# EAGLE board Tube_board_v4 (EAGLE 6.5.0)
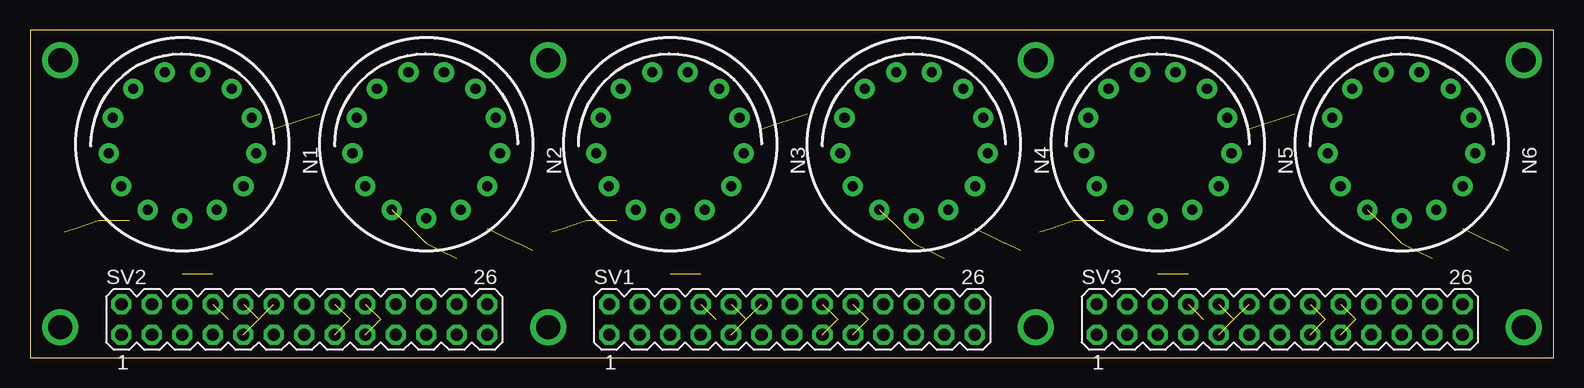
[diagram p0: board, top side]
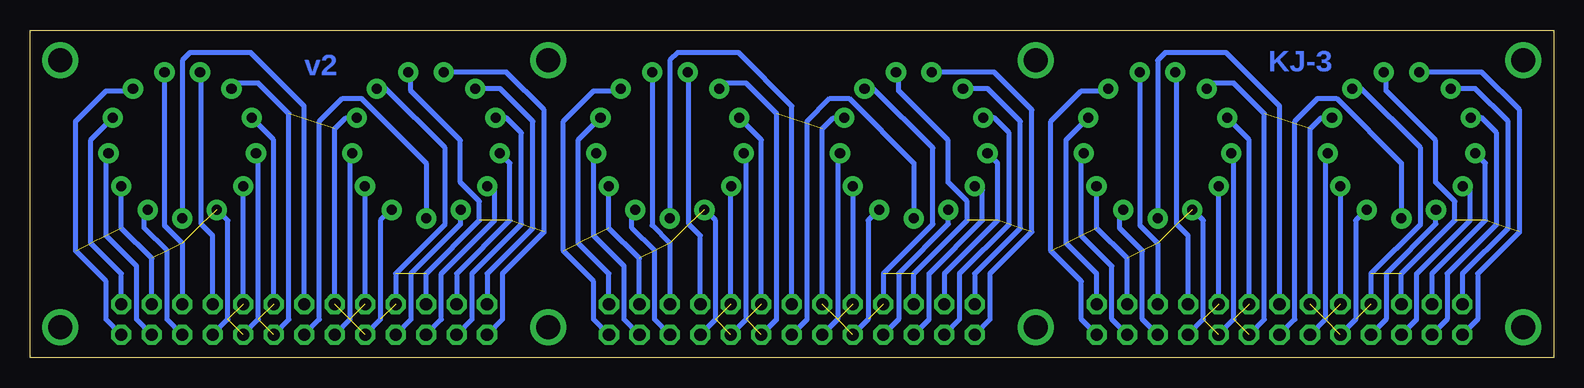
[diagram p1: board, bottom side, seen from below]

Size 126.99 x 27.3 mm. Coordinates in mm from the lower left corner, seen from the top.
Outline: 0,0 126.99,0 126.99,27.3 0,27.3 0,0
Copper layers (1*16): Top 0.035mm / dielectric 1.5mm / Bottom 0.035mm
Design rules "default": minimum track width 10mil, minimum drill 24mil, track to track 8mil, track to pad 8mil, pad to pad 8mil, via to via 8mil, smd to smd 8mil, copper to edge 40mil, drill to drill 8mil, minimum pad ring 10mil, minimum via ring 8mil, stop-mask expansion 4mil, vias tented up to drill 0mil, thermal gap 10mil
Net classes: 0 default: width 0.051 mm, clearance 0.205 mm

## Footprints (pad centres in the part's own frame; a part is rotated, then mirrored left to right if it is on the bottom)
IN-14 = drill 0.84 pad 1.676: 0 5.094,-3.516; 1 -5.094,-3.516; 2 -6.145,-0.746; 3 -5.788,2.195; 4 -4.105,4.633; 5 -1.481,6.01; 6 1.481,6.01; 7 4.105,4.633; 8 5.788,2.195; 9 6.145,-0.746; A 0,-6.19; LHDP 2.877,-5.481; RHDP -2.877,-5.481
MA13-2 = drill 1.016 pad 1.676 octagon: 1 -15.24,-1.27; 2 -15.24,1.27; 3 -12.7,-1.27; 4 -12.7,1.27; 5 -10.16,-1.27; 6 -10.16,1.27; 7 -7.62,-1.27; 8 -7.62,1.27; 9 -5.08,-1.27; 10 -5.08,1.27; 11 -2.54,-1.27; 12 -2.54,1.27; 13 0,-1.27; 14 0,1.27; 15 2.54,-1.27; 16 2.54,1.27; 17 5.08,-1.27; 18 5.08,1.27; 19 7.62,-1.27; 20 7.62,1.27; 21 10.16,-1.27; 22 10.16,1.27; 23 12.7,-1.27; 24 12.7,1.27; 25 15.24,-1.27; 26 15.24,1.27

## Placement (x,y rotation side)
N1  IN-14  [IN-14]  12.7,17.78 0 top
N2  IN-14  [IN-14]  33.02,17.78 0 top
N3  IN-14  [IN-14]  53.34,17.78 0 top
N4  IN-14  [IN-14]  73.66,17.78 0 top
N5  IN-14  [IN-14]  93.98,17.78 0 top
N6  IN-14  [IN-14]  114.3,17.78 0 top
SV1  [MA13-2]  63.5,3.17 0 top
SV2  [MA13-2]  22.86,3.17 0 top
SV3  [MA13-2]  104.14,3.17 0 top

## Library data of the parts
N1-N6 = russian-nixies
SV1-SV3 = con-lstb; OC_FARNELL: unknown; OC_NEWARK: unknown

## Nets
N$1: N1.A SV2.13
N$2: N2.A SV2.14
N$3: N1.0 N1.1 N1.2 N1.3 N1.4 N1.5 N1.6 N1.7 N1.8 N1.9 N1.LHDP N1.RHDP N2.0 N2.1 N2.2 N2.3 N2.4 N2.5 N2.6 N2.7 N2.8 N2.9 N2.LHDP N2.RHDP SV2.1 SV2.2 SV2.3 SV2.4 SV2.5 SV2.6 SV2.7 SV2.8 SV2.9 SV2.10 SV2.11 SV2.12 SV2.15 SV2.16 SV2.17 SV2.18 SV2.19 SV2.20 SV2.21 SV2.22 SV2.23 SV2.24 SV2.25 SV2.26
N$4: N3.A SV1.13
N$5: N4.A SV1.14
N$10: N3.0 N3.1 N3.2 N3.3 N3.4 N3.5 N3.6 N3.7 N3.8 N3.9 N3.LHDP N3.RHDP N4.0 N4.1 N4.2 N4.3 N4.4 N4.5 N4.6 N4.7 N4.8 N4.9 N4.LHDP N4.RHDP SV1.1 SV1.2 SV1.3 SV1.4 SV1.5 SV1.6 SV1.7 SV1.8 SV1.9 SV1.10 SV1.11 SV1.12 SV1.15 SV1.16 SV1.17 SV1.18 SV1.19 SV1.20 SV1.21 SV1.22 SV1.23 SV1.24 SV1.25 SV1.26
N$13: N5.A SV3.13
N$14: N6.A SV3.14
N$15: N5.0 N5.1 N5.2 N5.3 N5.4 N5.5 N5.6 N5.7 N5.8 N5.9 N5.LHDP N5.RHDP N6.0 N6.1 N6.2 N6.3 N6.4 N6.5 N6.6 N6.7 N6.8 N6.9 N6.LHDP N6.RHDP SV3.1 SV3.2 SV3.3 SV3.4 SV3.5 SV3.6 SV3.7 SV3.8 SV3.9 SV3.10 SV3.11 SV3.12 SV3.15 SV3.16 SV3.17 SV3.18 SV3.19 SV3.20 SV3.21 SV3.22 SV3.23 SV3.24 SV3.25 SV3.26

## Tracks (layer width: path | path; a pad name or v marks a point on that pad's centre or on a via)
N$1
  Bottom 0.406: N1.A 12.7,16.19 18.1,21.59 19.68,21.59 21.59,19.68 21.59,3.17 SV2.13
N$2
  Bottom 0.406: SV2.14 22.86,20.95 27.3,25.4 32.38,25.4 33.02,24.77 N2.A
N$3  (23 unrouted)
  Bottom 0.406: N1.RHDP 9.82,11.13 13.97,6.99 13.97,3.17 SV2.7 | N1.9 19.05,16.83 19.05,3.17 SV2.11 | N2.4 28.47,22.86 26.67,22.86 24.13,20.32 24.13,3.17 SV2.15 | SV2.16 25.4,18.14 N2.3 | SV2.17 26.67,3.17 26.67,16.83 N2.2 | SV2.18 N2.1 | SV2.19 29.21,3.17 29.21,11.43 30.08,12.3 N2.RHDP | SV2.20 30.48,10.16 31.43,11.11 31.43,23.68 N2.5 | N2.6 34.5,11.01 33.02,9.53 SV2.22 | SV2.21 34.29,3.17 34.29,8.89 36.2,10.79 36.2,12 N2.LHDP | SV2.24 35.56,8.26 38.1,10.79 N2.0 | SV2.23 36.83,3.17 36.83,7.62 39.37,10.16 39.37,16.83 N2.9 | SV2.26 38.1,6.99 40.64,9.53 40.64,18.14 N2.8 | SV2.25 39.37,3.17 39.37,6.35 41.91,8.89 41.91,19.68 39.37,22.23 37.31,22.23 N2.7 | N1.7 16.06,22.41 11.11,17.46 11.11,11.11 15.24,6.99 SV2.8 | N1.6 13.97,23.58 13.97,22.23 9.84,18.1 9.84,14.61 8.26,13.02 8.26,11.43 12.7,6.99 SV2.6 | N1.1 7.28,14.26 6.99,13.97 6.99,11.43 11.43,6.99 11.43,3.17 SV2.5 | N1.2 5.71,16.19 5.71,11.43 10.16,6.99 SV2.4 | N1.3 6,19.98 4.76,18.73 4.76,11.11 8.89,6.99 8.89,3.17 SV2.3 | N1.4 6.54,22.41 3.81,19.68 3.81,10.79 7.62,6.99 SV2.2 | N1.5 6.01,23.79 2.86,20.64 2.86,10.48 6.35,6.99 6.35,3.17 SV2.1 | SV2.12 20.32,19.05 19.39,19.98 N1.8 | N1.0 17.79,4.46 SV2.10 | N1.LHDP 15.58,12.36 16.51,11.43 16.51,3.17 SV2.9
N$4
  Bottom 0.406: N3.A 53.34,16.19 58.74,21.59 60.33,21.59 62.23,19.68 62.23,3.17 SV1.13
N$5
  Bottom 0.406: SV1.14 63.5,20.95 67.94,25.4 73.03,25.4 73.66,24.77 N4.A
N$6  (via drill 2)
  other vias: 2.54,24.77
N$7  (via drill 2)
  other vias: 2.54,2.54
N$8  (via drill 2)
  other vias: 43.18,24.77
N$9  (via drill 2)
  other vias: 43.18,2.54
N$10  (23 unrouted)
  Bottom 0.406: N3.RHDP 50.46,11.13 54.61,6.99 54.61,3.17 SV1.7 | N3.9 59.69,16.83 59.69,3.17 SV1.11 | N4.4 69.11,22.86 67.31,22.86 64.77,20.32 64.77,3.17 SV1.15 | SV1.16 66.04,18.14 N4.3 | SV1.17 67.31,3.17 67.31,16.83 N4.2 | SV1.18 N4.1 | SV1.19 69.85,3.17 69.85,11.43 70.72,12.3 N4.RHDP | SV1.20 71.12,10.16 72.07,11.11 72.07,23.68 N4.5 | N4.6 75.14,11.01 73.66,9.53 SV1.22 | SV1.21 74.93,3.17 74.93,8.89 76.83,10.79 76.83,12 N4.LHDP | SV1.24 76.2,8.26 78.74,10.79 N4.0 | SV1.23 77.47,3.17 77.47,7.62 80.01,10.16 80.01,16.83 N4.9 | SV1.26 78.74,6.99 81.28,9.53 81.28,18.14 N4.8 | SV1.25 80.01,3.17 80.01,6.35 82.55,8.89 82.55,19.68 80.01,22.23 77.95,22.23 N4.7 | N3.7 56.7,22.41 51.75,17.46 51.75,11.11 55.88,6.99 SV1.8 | N3.6 54.61,23.58 54.61,22.23 50.48,18.1 50.48,14.61 48.9,13.02 48.9,11.43 53.34,6.99 SV1.6 | N3.1 47.92,14.26 47.62,13.97 47.62,11.43 52.07,6.99 52.07,3.17 SV1.5 | N3.2 46.35,16.19 46.35,11.43 50.8,6.99 SV1.4 | N3.3 46.65,19.98 45.4,18.73 45.4,11.11 49.53,6.99 49.53,3.17 SV1.3 | N3.4 47.18,22.41 44.45,19.68 44.45,10.79 48.26,6.99 SV1.2 | N3.5 46.65,23.79 43.5,20.64 43.5,10.48 46.99,6.99 46.99,3.17 SV1.1 | SV1.12 60.96,19.05 60.03,19.98 N3.8 | N3.0 58.43,4.46 SV1.10 | N3.LHDP 56.22,12.36 57.15,11.43 57.15,3.17 SV1.9
N$11  (via drill 2)
  other vias: 83.82,24.77 124.46,24.77 124.46,2.54
N$12  (via drill 2)
  other vias: 83.82,2.54
N$13
  Bottom 0.406: N5.A 93.98,16.19 99.38,21.59 100.97,21.59 102.87,19.68 102.87,3.17 SV3.13
N$14
  Bottom 0.406: SV3.14 104.14,20.95 108.58,25.4 113.67,25.4 114.3,24.77 N6.A
N$15  (23 unrouted)
  Bottom 0.406: N5.RHDP 91.1,11.13 95.25,6.99 95.25,3.17 SV3.7 | N5.9 100.33,16.83 100.33,3.17 SV3.11 | N6.4 109.75,22.86 107.95,22.86 105.41,20.32 105.41,3.17 SV3.15 | SV3.16 106.68,18.14 N6.3 | SV3.17 107.95,3.17 107.95,16.83 N6.2 | SV3.18 N6.1 | SV3.19 110.49,3.17 110.49,11.43 111.36,12.3 N6.RHDP | SV3.20 111.76,10.16 112.71,11.11 112.71,23.68 N6.5 | N6.6 115.78,11.01 114.3,9.53 SV3.22 | SV3.21 115.57,3.17 115.57,8.89 117.47,10.79 117.47,12 N6.LHDP | SV3.24 116.84,8.26 119.38,10.79 N6.0 | SV3.23 118.11,3.17 118.11,7.62 120.65,10.16 120.65,16.83 N6.9 | SV3.26 119.38,6.99 121.92,9.53 121.92,18.14 N6.8 | SV3.25 120.65,3.17 120.65,6.35 123.19,8.89 123.19,19.68 120.65,22.23 118.59,22.23 N6.7 | N5.7 97.34,22.41 92.39,17.46 92.39,11.11 96.52,6.99 SV3.8 | N5.6 95.25,23.58 95.25,22.23 91.12,18.1 91.12,14.61 89.53,13.02 89.53,11.43 93.98,6.99 SV3.6 | N5.1 88.56,14.26 88.27,13.97 88.27,11.43 92.71,6.99 92.71,3.17 SV3.5 | N5.2 87,16.19 87,11.43 91.44,6.99 SV3.4 | N5.3 87.28,19.98 86.04,18.73 86.04,11.11 90.17,6.99 90.17,3.17 SV3.3 | N5.4 87.82,22.41 85.09,19.68 85.09,10.79 88.9,6.99 SV3.2 | N5.5 87.29,23.79 84.14,20.64 84.14,10.48 87.63,6.99 87.63,3.17 SV3.1 | SV3.12 101.6,19.05 100.67,19.98 N5.8 | N5.0 99.07,4.46 SV3.10 | N5.LHDP 96.86,12.36 97.79,11.43 97.79,3.17 SV3.9

## Text on the board
Bottom: KJ-3 | v2